# Altium PCB MOD-ADC-10.PCBDOC (part 2 of 4)
Units mm, origin at the board's own origin, x right, y up, seen from the top; angles counter-clockwise.
Board outline 80 x 100 mm, 4 copper layers (L1, P2, L3, L4), stack 1.512 mm thick; 199 components, 170 nets, 717 pads, 298 vias.
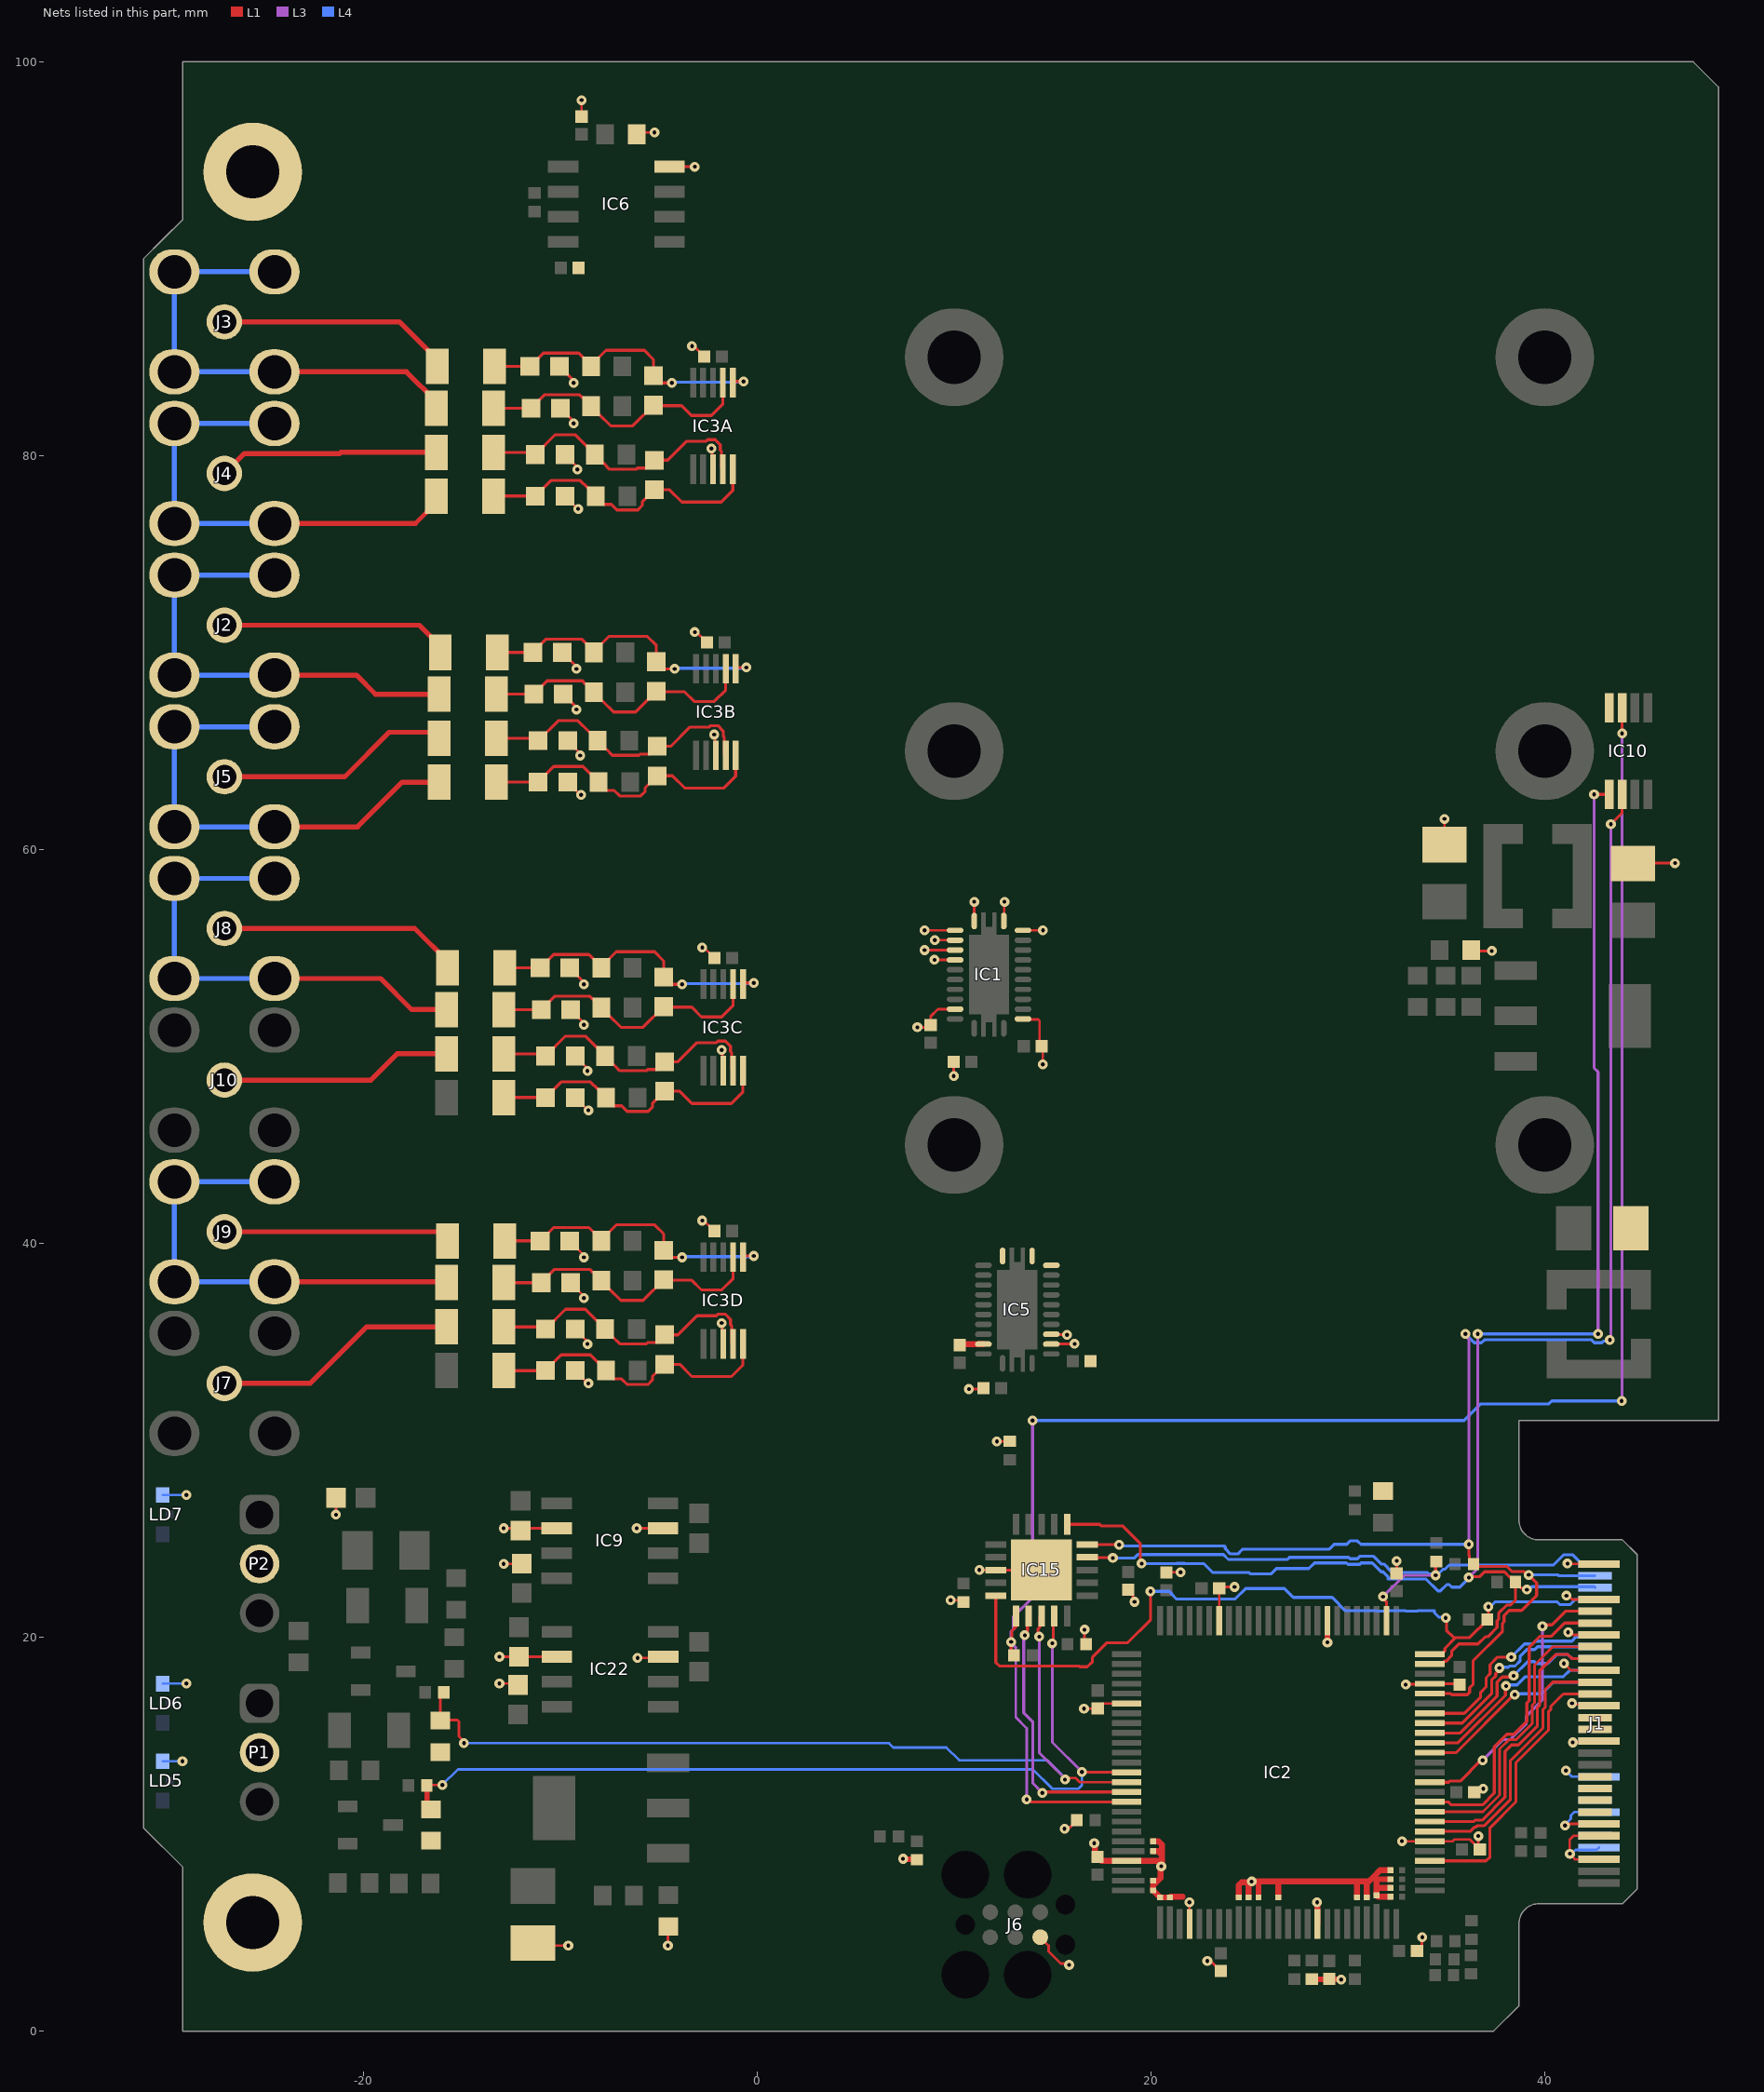
[diagram p4: the nets of this part, all layers, seen from the top]

## Part data
B1 B2 B3 B4 B5 B6 B7 B8: library part PLATED_HOLE2.7_PAD5.0, "Single Terminal Socket", Author="CERN DEM JMW", ComponentHeight=0mm, Component Type="Standard (No BOM)", CreateDate=27.09.2011, Family="Plated Hole", HelpURL=Undefined, LatestRevisionDate=27.09.2011, Mounted=No, PackageDescription="Plated Through Hole: Hole Dia.=2.7mm Pad Dia.=5.0mm", Part Description="Plated Through Hole: Hole Dia.=2.7mm Pad Dia.=5.0mm", Part Number=PLATED_HOLE2.7_PAD5.0, Pin Count=1, Sense=No, SMD=No, Socket=No, Status=None
C1A C1B C1C C1D C6A C6B C6C C6D C7A C7B C7C C7D C8A C8B C8C C8D C9A C9B C9C C9D C10A C10B C10C C10D: library part CC0603_1NF_50V_5%_NP0, "Non-polarised capacitor", Case=0603, Manufacturer=GENERIC, Manufacturer1 ComponentHeight=0.9mm, Manufacturer1 Example="YAGEO PHYCOMP", Manufacturer1 Part Number=CC0603JRNPO9BN102, Tolerance=±5%, Voltage=50V, Author="CERN DEM JLC", Component Type=Standard, CreateDate=22.10.2012, HelpURL=\\cern.ch\dfs\Applications\Altium\Datasheets\CC0805_NP0_PHYCOMP_16VTO50V.pdf, LatestRevisionDate=22.10.2012, Manufacturer Part Number=CC0603_1NF_50V_5%_NP0, Mounted=Yes, Part Description="SMD Multilayer Chip Ceramic Capacitor", Part Number=CC0603_1NF_50V_5%_NP0, Pin Count=2, Sense=No, SMD=Yes, Socket=No, Status=Preferred, TC=C0G/NP0
C2 C3 C4 C5 C11 C18 C20 C23 C24 C25 C29 C30: library part CC0402_1UF_16V_10%_X5R, "Non-polarised capacitor", Case=0402, Manufacturer=GENERIC, Manufacturer1 ComponentHeight=0.55mm, Manufacturer1 Example=TDK, Manufacturer1 Part Number=C1005X5R1C105KT, Tolerance=±10%, Voltage=16V, Author="CERN DEM JLC", Component Type=Standard, CreateDate=25.10.2012, HelpURL=\\cern.ch\dfs\Applications\Altium\Datasheets\CC0402_X5R_TDK_C.pdf, LatestRevisionDate=25.10.2012, Manufacturer Part Number=CC0402_1UF_16V_10%_X5R, Mounted=Yes, Part Description="SMD Multilayer Chip Ceramic Capacitor", Part Number=CC0402_1UF_16V_10%_X5R, Pin Count=2, Sense=No, SMD=Yes, Socket=No, Status=Preferred, TC=X5R
C12 C13 C14 C15: library part CTE3528-21_22UF_20V_10%, "Polarised capacitor", Case=B, Manufacturer=GENERIC, Manufacturer1 ComponentHeight=2.1mm, Manufacturer1 Example=AVX, Manufacturer1 Part Number=TAJB226K020R, Tolerance=±10%, Voltage=20V, Author="CERN DEM JLC", Component Type=Standard, CreateDate=03.12.2007, HelpURL=\\cern.ch\dfs\Applications\Altium\Datasheets\CTE_AVX_TAJ.pdf, LatestRevisionDate=03.12.2007, Manufacturer Part Number=CTE3528-21_22UF_20V_10%, Mounted=Yes, Part Description="Solid Tantalum Chip Capacitor", Part Number=CTE3528-21_22UF_20V_10%, Pin Count=2, Sense=No, SMD=Yes, Socket=No, Status=Preferred
C16 C17 C19 C22 C26 C27 C28 C31 C35A C35B C35C C35D: library part CC0402_100NF_16V_10%_X7R, "Non-polarised capacitor", Case=0402, Manufacturer=GENERIC, Manufacturer1 ComponentHeight=0.55mm, Manufacturer1 Example=MURATA, Manufacturer1 Part Number=GRM155R71C104KA88D, Tolerance=±10%, Voltage=16V, Author="CERN DEM JLC", Component Type=Standard, CreateDate=12/5/2013, HelpURL=\\cern.ch\dfs\Applications\Altium\Datasheets\CC0402_X7R_MURATA_GRM.pdf, LatestRevisionDate=12/3/2007, Manufacturer Part Number=CC0402_100NF_16V_10%_X7R, Mounted=Yes, Part Description="SMD Multilayer Chip Ceramic Capacitor", Part Number=CC0402_100NF_16V_10%_X7R, Pin Count=2, Sense=No, SMD=Yes, Socket=No, Status="Not Recommended", TC=X7R
C32 C33 C34 C47 C48 C49 C50: library part CC0603_10UF_10V_10%_X5R, "Non-polarised capacitor", Case=0603, Manufacturer=GENERIC, Manufacturer1 ComponentHeight=0.8mm, Manufacturer1 Example=MURATA, Manufacturer1 Part Number=GRM188R61A106KE69D, Tolerance=±10%, Voltage=10V, Author="CERN DEM JLC", Component Type=Standard, CreateDate=31.01.2017, HelpURL=\\cern.ch\dfs\Applications\Altium\Datasheets\CC0603_MURATA_GRM188R61A106KE69D.pdf, LatestRevisionDate=31.01.2017, Manufacturer Part Number=CC0603_10UF_10V_10%_X5R, Mounted=Yes, Part Description="SMD Multilayer Chip Ceramic Capacitor", Part Number=CC0603_10UF_10V_10%_X5R, Pin Count=2, Sense=No, SMD=Yes, Socket=No, Status=None, TC=X5R
F1 F2: library part FUSR1206_TYCO_NANOSMD016F, "Fuse", Manufacturer="TYCO ELECTRONICS", Manufacturer Part Number=nanoSMDC016F, Author="CERN DEM JLC", Component Type=Standard, ComponentHeight=1mm, CreateDate=03.07.2008, Family="Fuses Resettable", HelpURL=\\cern.ch\dfs\Applications\Altium\Datasheets\FUSR_TYCO_NanoSMD016F.pdf, LatestRevisionDate=04.08.2008, Mounted=Yes, PackageDescription="Chip Resettable Fuse, 2-Leads, Body 3.2mmx1.6mm, IPC Medium Density", Part Description="PolySwitch® PTC Overcurrent Protection Device", Part Number=FUSR1206_TYCO_NANOSMD016F, Pin Count=2, PressFit=No, Sense=No, SMD=Yes, Socket=No, Status=Obsolete, Status Comment="Replaced by LITTELFUSE nanoSMDC016F"
IC1 IC5: "8-Bit Dual-Supply Bus Transceiver With Configurable Voltage Translation and 3-State Outputs", Case=QFN24, Manufacturer="TEXAS INSTRUMENTS", Author="CERN DEM BC", Bonding=No, Component Type=Standard, ComponentHeight=1mm, CreateDate=05.05.2020, Device=SN74LXC8T245RHL, HelpURL=\\cern.ch\dfs\Applications\Altium\Datasheets\SN74LXC8T245.pdf, LatestRevisionDate=05.05.2020, Manufacturer Part Number=SN74LXC8T245RHL, Mounted=Yes, PackageDescription="TEXAS Case Style RHL (S-PVQFN-N24), QFN, 0.50mm Pitch, Rect.; 24 Pin, 5.50mm L X 3.50mm W X 1mm H body (w/Thermal Tab 4.05 X 2.05mm)", Part Description="SN74LXC8T245 8-bit Dual-Supply Bus Transceiver with Configurable Level Shifting and 3-State Outputs", Part Number=SN74LXC8T245RHL, Pin Count=25, PressFit=No, Sense=No, SMD=Yes, Socket=No
IC2: "MachXO2, 2.5V/3.3V High-Performance 2000 Macrocell CPLD, 80 I/Os, 100-Pin TQFP, Speed Grade 4, Industrial Grade", Case=QFP100, Manufacturer="LATTICE SEMICONDUCTOR", Author="CERN DEM MR", Bonding=No, Component Type=Standard, ComponentHeight=1.6mm, ComponentLink1Description="Package Drawing", ComponentLink1URL=\\cern.ch\dfs\Applications\Altium\Datasheets\LATTICE_Package.pdf, ComponentLink2Description=Pinout, ComponentLink2URL=\\cern.ch\dfs\Applications\Altium\Datasheets\LCMXO3LF-1300C-5TG100_Pinout.pdf, CreateDate=18.06.2019, Device=LCMXO3LF-1300C-5TG100C, HelpURL=\\cern.ch\dfs\Applications\Altium\Datasheets\LCMXO3LF_Serie.pdf, LatestRevisionDate=18.06.2019, Manufacturer Part Number=LCMXO3LF-1300C-5TG100C, Mounted=Yes, PackageDescription="QFP, 0.50mm Pitch, Square; 100 Pin, 14.0mm L X 14.0mm W X 1.60mm H body, IPC Medium Density", Part Description="MachXO3LF, 2.5V/3.3V Low-Density Ultra-Low Power FPGA, 1300 LUTs, 80 I/Os, 100-Pin TQFP, Speed Grade 5, Commercial Grade", Part Number=LCMXO3LF-1300C-5TG100C, Pin Count=100, PressFit=No, Sense=No, SMD=Yes, Socket=No
IC3A IC3B IC3C IC3D: "Quad Channel Single ADC Delta-Sigma 860sps 16-bit Serial 10-Pin VSSOP T/R", Case/Package=VSSOP, Manufacturer="Texas Instruments", Max Operating Temperature=125°C, Max Power Dissipation=900uW, Max Supply Voltage=5.5V, Min Operating Temperature=-40°C, Min Supply Voltage=2V, Operating Supply Voltage=3.3V, Package Quantity=250, Supplier Part Number=595-ADS1118IDGST, Supply Current=150uA, Category="Analog to Digital Converters (ADCs)", ComponentLink1Description=https://datasheet.ciiva.com/7989/1634024-7989312.pdf?src-supplier=Element14, ComponentLink1URL=https://datasheet.ciiva.com/7989/1634024-7989312.pdf?src-supplier=Element14, ComponentLink2Description=https://datasheet.ciiva.com/41461/001186694-da-01-en-ic-adc-16bit-sp-ads1118idgst-msop-10-tid-41461012.pdf?src-supplier=Conrad, ComponentLink2URL=https://datasheet.ciiva.com/41461/001186694-da-01-en-ic-adc-16bit-sp-ads1118idgst-msop-10-tid-41461012.pdf?src-supplier=Conrad, ComponentLink3Description=https://datasheet.ciiva.com/1261/ads1118-1261457.pdf?src-supplier=Digikey, ComponentLink3URL=https://datasheet.ciiva.com/1261/ads1118-1261457.pdf?src-supplier=Digikey, ComponentLink4Description=https://datasheet.ciiva.com/1261/ads1118-1261458.pdf?src-supplier=Digikey, ComponentLink4URL=https://datasheet.ciiva.com/1261/ads1118-1261458.pdf?src-supplier=Digikey, ComponentLink5Description=https://datasheet.ciiva.com/1261/ads1118-1261459.pdf?src-supplier=Digikey, ComponentLink5URL=https://datasheet.ciiva.com/1261/ads1118-1261459.pdf?src-supplier=Digikey, ComponentLink6Description=https://datasheet.ciiva.com/14259/ads1118-14259989.pdf?src-supplier=Avnet, ComponentLink6URL=https://datasheet.ciiva.com/14259/ads1118-14259989.pdf?src-supplier=Avnet, ComponentLink7Description=https://datasheet.ciiva.com/46394/1793017-46394506.pdf?src-supplier=Element14, ComponentLink7URL=https://datasheet.ciiva.com/46394/1793017-46394506.pdf?src-supplier=Element14, ComponentLink8Description=https://datasheet.ciiva.com/46394/1793017-46394507.pdf?src-supplier=Element14, ComponentLink8URL=https://datasheet.ciiva.com/46394/1793017-46394507.pdf?src-supplier=Element14, Contact Plating=Gold, Conversion Rate=860S/s, Height=1.1mm, Integral Nonlinearity (INL)=1LSB, Interface=SPI, Lead Free="Lead Free", Length=3.1mm, Manufacturer Part Number=ADS1118IDGST, Max Supply Voltage (DC)=5.5V, Min Supply Voltage (DC)=2V, Number of A/D Converters=1, Number of Bits=16, Number of Channels=2, Number of Converters=1, Number of Elements=1, Number of Inputs=4, Packaging="Tape and Reel", Pins=10, Polarity=Bipolar, Power Dissipation=900uW, Pricing="1=6.29, 10=4.83, 25=4.47, 50=4.47, 100=4.07, 250=3.87, 500=3.69, 1000=3.59, 2500=3.5, 10000=3.59 (USD)", Reach SVHC Compliant=No, Resolution=16b, RoHS=Yes, RoHS Compliant=Yes, Sampling Rate=860S/s, Series=-, Stock=2422, Supplier=Mouser, Supply Type=Single, Thickness=1.02mm, Width=3.1mm
IC6: "Dual Operational Amplifier", Case=SOIC8, Manufacturer="ST MICROELECTRONICS", Author="CERN DEM HF", Bonding=No, Component Type=Standard, ComponentHeight=1.75mm, CreateDate=21.12.2023, Device=LMV358IDT, HelpURL=\\cern.ch\dfs\Applications\Altium\Datasheets\LMV358.pdf, LatestRevisionDate=21.12.2023, Manufacturer Part Number=LMV358IDT, Mounted=Yes, PackageDescription="SOIC 8, Pitch 1.27mm - Body 4x5mm, IPC Medium Density", Part Description="Dual General Purpose, Low Voltage, Tiny Pack Comparator", Part Number=LMV358IDT, Pin Count=8, PressFit=No, Sense=No, SMD=Yes, Socket=No
IC7 IC8: "3-Terminal Regulator 1=Adj 2=OUT 3=IN 4=OUT", Case=SOT223, Manufacturer="TEXAS INSTRUMENTS", Manufacturer Part Number=LM1117IMPX-ADJ, Author="CERN DEM JLC", Bonding=No, Component Type=Standard, ComponentHeight=1.8mm, CreateDate=05.10.2011, Device=LM1117IMPX-ADJ/NOPB, HelpURL=\\cern.ch\dfs\Applications\Altium\Datasheets\LM1117IMPX-ADJ-NOPB.pdf, LatestRevisionDate=01.06.2022, Mounted=Yes, PackageDescription="SOT223, 2.30mm Pitch; 4 Pin, 3.70mm W X 6.70mm L X 1.80mm H body, IPC Medium Density", Part Description="1.25V to 13.8V, 800mA, Adjustable Low-Dropout Linear Regulator", Part Number=LM1117IMPX-ADJ/NOPB, Pin Count=4, PressFit=No, Sense=No, SMD=Yes, Socket=No
IC9 IC22: "Super Charge Pump DC-to-DC Voltage Converter", Case=SOIC8, Manufacturer="MICROCHIP TECHNOLOGY", Author="CERN DEM HF", Bonding=No, Component Type=Standard, ComponentHeight=1.75mm, CreateDate=28.02.2024, Device=TC7660SEOA, HelpURL=\\cern.ch\dfs\Applications\Altium\Datasheets\TC7660S.pdf, LatestRevisionDate=28.02.2024, Manufacturer Part Number=TC7660SEOA, Mounted=Yes, PackageDescription="SOIC 8, Pitch 1.27mm, Body 4x5mm, IPC Medium Density", Part Description="Super Charge Pump DC-to-DC Voltage Converter", Part Number=TC7660SEOA, Pin Count=8, PressFit=No, Sense=No, SMD=Yes, Socket=No
IC10: "High Accuracy Temperature Sensor With I2C and SMBus Interface in Industry Standard LM75", Case=uSOP8, Manufacturer="TEXAS INSTRUMENTS", Author="CERN DEM MR", Bonding=No, Component Type=Standard, ComponentHeight=1.1mm, CreateDate=04.10.2019, Device=TMP1075DGK, HelpURL=\\cern.ch\dfs\Applications\Altium\Datasheets\TMP1075DGK.pdf, LatestRevisionDate=04.10.2019, Manufacturer Part Number=TMP1075DGK, Mounted=Yes, PackageDescription="SOP, 0.65mm Pitch; 8 Pin, 3.00mm W X 3.00mm L X 1.10mm H body, IPC Medium Density", Part Description="High Accuracy Temperature Sensor with I2C and SMBus Interface in Industry Standard LM75", Part Number=TMP1075DGK, Pin Count=8, PressFit=No, Sense=No, SMD=Yes, Socket=No
IC15: library part IFC_PCA9501BS, "8-bit I2C-bus and SMBus I/O port with interrupt, 2-kbit / EEPROM and 6 address pins", Manufacturer=NXP, Manufacturer Part Number=PCA9501BS,118, Part Number=PCA9501BS
J1: library part AMPHENOL_MINI-Cool-56P, "64 contacts Board Eddge PCI Express x4 Socket", Manufacturer=AMPHENOL, Author="CERN DEM HF", Component Type="Standard (No BOM)", ComponentHeight=0mm, CreateDate=05.01.2026, HelpURL=\\cern.ch\dfs\Applications\Altium\Datasheets\AMPHENOL_ME1005610101011.pdf, LatestRevisionDate=05.01.2026, Manufacturer Part Number=AMPHENOL_MINI-Cool-56P, Mounted=Yes, Part Description="PCB Mini Cool Edge 0.60mm,Storage and Server connector ,Gen Z, 56 signal pins, SMT", Part Number=AMPHENOL_MINI-Cool-56P, Pin Count=56, PressFit=No, Sense=No, SMD=Yes, Socket=No, Status=None
J2 J3 J4 J5 J7 J8 J9 J10: "WR-MCX PCB Jack, THT, Right Angle, Solder Leg 1.73mm", Frequency Range=DC~6GHz, Manufacturer="Wurth Elektronik", Operating Temperature Max=155°C, Operating Temperature Min=-55°C, Category="Coaxial Connectors", Center Contact Diameter=0.96mm, ComponentLink1Description="Website Link", ComponentLink1URL=https://www.we-online.com/redexpert/article/60611002111502?ad, ComponentLink2Description="Datasheet Link", ComponentLink2URL=https://www.we-online.com/redexpert/spec/60611002111502?ad, Connector Type=MCX, Gender=Jack, Impedance=50Ω, Interface Type="IEC 61169-36", Manufacturer Part Number=60611002111502, Match Code=WR-MCX, Mount="Through Hole", Orientation="Right Angle", Packaging=Tray, PANEL_FEATURE=Yes
  J2: PANEL_LABEL=CH2
  J3: PANEL_LABEL=CH0
  J4: PANEL_LABEL=CH1
  J5: PANEL_LABEL=CH3
  J7: PANEL_LABEL=CH7
  J8: PANEL_LABEL=CH4
  J9: PANEL_LABEL=CH6
  J10: PANEL_LABEL=CH5
J6: "TC2030-MCP and TC2030-MCP-NL Pad Contact", Author="CERN DEM HF", Component Type="Standard (No BOM)", ComponentHeight=0mm, CreateDate=27.03.2023, Family=TC2030-MCP, HelpURL=\\cern.ch\dfs\Applications\Altium\Datasheets\TC2030-MCP.pdf, LatestRevisionDate=27.03.2023, Mounted=No, PackageDescription="6 X 31mil Diameter SMD Pad For TC2030-MCP Legged Connector", Part Description="6 X 31mil Diameter SMD Pad For TC2030-MCP Legged Connector", Part Number=TC2030-MCP, Pin Count=6, Sense=No, SMD=Yes, Socket=No, Status=None
L1 L2: library part IND_33UH_30%_WURTH_WE-TPC_744043330, "Inductor With Core", Manufacturer="WURTH ELEKTRONIK", Manufacturer Part Number=744043330, Power=820mA, Resistance=0.23R, Tolerance=±30%, Author="CERN DEM JLC", Component Type=Standard, ComponentHeight=3mm, CreateDate=24.11.2014, HelpURL=\\cern.ch\dfs\Applications\Altium\Datasheets\IND_WURTH_WE-TPC_744043330.pdf, LatestRevisionDate=24.11.2014, Mounted=Yes, Part Description="Shielded Tiny Power Inductor (WE-TPC Series)", Part Number=IND_33UH_30%_WURTH_WE-TPC_744043330, Pin Count=2, Sense=No, SMD=Yes, Socket=No
L4: library part IND1210_100UH_10%_EPCOS_B82422H, "Inductor With Core", Case=1210, Manufacturer=EPCOS, Manufacturer Part Number=B82422H1104K000, Power=150mA, Resistance=4.8R, Tolerance=±10%, Author="CERN DEM JLC", Component Type=Standard, ComponentHeight=2.4mm, CreateDate=04.06.2012, HelpURL=\\cern.ch\dfs\Applications\Altium\Datasheets\IND1210_EPCOS_B82422H.pdf, LatestRevisionDate=04.06.2012, Mounted=Yes, Part Description="SMT Inductor SIMID Series", Part Number=IND1210_100UH_10%_EPCOS_B82422H, Pin Count=2, Sense=No, SMD=Yes, Socket=No
LD5: library part LED_AVAGO_HSME-C120, "LED Green 1C 2A", Manufacturer="AVAGO TECHNOLOGIES", Manufacturer Part Number=HSME-C120, Author="CERN DEM JMW", Bonding=No, Color=Green, Component Type=Standard, ComponentHeight=0.7mm, ComponentLink1Description="Design Guide", ComponentLink1URL=\\cern.ch\dfs\Applications\Altium\Datasheets\LED_AVAGO_HSME-C110_DESIGN-GUIDE.pdf, CreateDate=22.07.2009, HelpURL=\\cern.ch\dfs\Applications\Altium\Datasheets\LED_AVAGO_HSME-C120.pdf, LatestRevisionDate=20.06.2012, Mounted=Yes, PackageDescription="Green Chip LED, 2-Leads, Body 1.7x1.1mm, Side Emitting Package", PANEL_FEATURE=Yes, PANEL_LABEL=STAT, Part Description="High Performance Right Angle Chip Green LED", Part Number=LED_AVAGO_HSME-C120, Pin Count=2, PressFit=No, Sense=No, SMD=Yes, Socket=No, Status="Not Recommended"
LD6 LD7: library part LED_AVAGO_HSMC-C120, "LED Red 1C 2A", Manufacturer="AVAGO TECHNOLOGIES", Manufacturer Part Number=HSMC-C120, Author="CERN DEM JMW", Bonding=No, Color=Red, Component Type=Standard, ComponentHeight=0.7mm, ComponentLink1Description="Design Guide", ComponentLink1URL=\\cern.ch\dfs\Applications\Altium\Datasheets\LED_AVAGO_HSMC-C120_DESIGN-GUIDE.pdf, CreateDate=22.07.2009, HelpURL=\\cern.ch\dfs\Applications\Altium\Datasheets\LED_AVAGO_HSMC-C120.pdf, LatestRevisionDate=20.06.2012, Mounted=Yes, PackageDescription="Red Chip LED, 2-Leads, Body 1.7x1.1mm, Side Emitting Package", PANEL_FEATURE=Yes, Part Description="High Performance Right Angle Chip Red LED", Part Number=LED_AVAGO_HSMC-C120, Pin Count=2, PressFit=No, Sense=No, SMD=Yes, Socket=No, Status="Not Recommended"
  LD6: PANEL_LABEL=OVL0
  LD7: PANEL_LABEL=OVL1
NT1 NT2 NT3 NT4 NT5 NT6 NT7 NT9 NT10 NT11 NT12 NT13 NT14 NT15 NT16 NT19 NT20: library part "Net Tie 3", Author="CERN DEM HF", Component Type="Net Tie", ComponentHeight=0mm, CreateDate=23.09.2024, Family="Net Tie", HelpURL=Undefined, LatestRevisionDate=23.09.2024, Mounted=No, PackageDescription="SMD Net Tie", Part Description="Net Tie (2 Nets)", Part Number="Net Tie 3", Pin Count=2, Sense=No, SMD=No, Socket=No, Status=None
P1 P2: "WR-TBL Series 382 Horizontal PCB Header, THT, pitch 2.5mm, 3p", Manufacturer="Wurth Elektronik", Operating Temperature Max=105°C, Operating Temperature Min=-40°C, Rated Current=4A, Working Voltage=160V, Application=Pluggable, Category="Terminal Blocks", ComponentLink1Description="Website Link", ComponentLink1URL=https://www.we-online.com/redexpert/article/691382010003?ad, ComponentLink2Description="Datasheet Link", ComponentLink2URL=https://www.we-online.com/redexpert/spec/691382010003?ad, Manufacturer Part Number=691382010003, Match Code=WR-TBL, Modularity=No, Mount="Through Hole", Number of Pins=3, Number of Rows=1, Orientation=Horizontal, Packaging=Box, PANEL_FEATURE=Yes, Pitch=2.5mm
  P1: PANEL_LABEL=PWR0-3
  P2: PANEL_LABEL=PWR4-7
R1 R2 R80: library part R0402_20K_1%_0.0625W_100PPM, "Resistor - 1%", Case=0402, Manufacturer=GENERIC, Manufacturer1 ComponentHeight=0.4mm, Manufacturer1 Example="YAGEO PHYCOMP", Manufacturer1 Part Number=232270672003L, Power=0.0625W, Tolerance=±1%, Author="CERN DEM JLC", Component Type=Standard, CreateDate=03.12.2007, HelpURL=\\cern.ch\dfs\Applications\Altium\Datasheets\R0402_Phycomp_RC0402.pdf, LatestRevisionDate=17.10.2012, Manufacturer Part Number=R0402_20K_1%_0.0625W_100PPM, Mounted=Yes, Part Description="General Purpose Thick Film Chip Resistor", Part Number=R0402_20K_1%_0.0625W_100PPM, Pin Count=2, PressFit=No, Sense=No, SMD=Yes, Socket=No, Status="Not Recommended", TC=±100ppm/°C
R3 R23 R24 R26 R27 R29 R30 R31 R32 R33 R35: library part R0603_4K7_1%_0.1W_100PPM, "Resistor - 1%", Case=0603, Manufacturer=GENERIC, Manufacturer1 ComponentHeight=0.55mm, Manufacturer1 Example="NIC COMPONENT", Manufacturer1 Part Number=NRC06F4701TRF, Power=0.1W, Tolerance=±1%, Author="CERN DEM JLC", Component Type=Standard, CreateDate=03.12.2007, HelpURL=\\cern.ch\dfs\Applications\Altium\Datasheets\R0603_NIC_NRC.pdf, LatestRevisionDate=13.03.2008, Manufacturer Part Number=R0603_4K7_1%_0.1W_100PPM, Mounted=Yes, Part Description="General Purpose Thick Film Chip Resistor", Part Number=R0603_4K7_1%_0.1W_100PPM, Pin Count=2, PressFit=No, Sense=No, SMD=Yes, Socket=No, Status=Preferred, TC=±100ppm/°C
R4A R4B R4C R4D R6A R6B R6C R6D R12A R12B R12C R12D R14A R14B R14C R14D: library part R1206_120K_0.1%_0.25W_25PPM, "Resistor - 0.1%", Case=1206, Manufacturer=GENERIC, Manufacturer1 ComponentHeight=0.70mm, Manufacturer1 Example=KOA, Manufacturer1 Part Number=RN73H2BTTD1203B25, Power=0.25W, Tolerance=±0.1%, Author="CERN DEM JLC", Component Type=Standard, CreateDate=03.12.2007, HelpURL=\\cern.ch\dfs\Applications\Altium\Datasheets\R1206_KOA_RN73H.pdf, LatestRevisionDate=13.03.2008, Manufacturer Part Number=R1206_120K_0.1%_0.25W_25PPM, Mounted=Yes, Part Description="Thin Film Chip Resistor", Part Number=R1206_120K_0.1%_0.25W_25PPM, Pin Count=2, PressFit=No, Sense=No, SMD=Yes, Socket=No, Status="Not Recommended", TC=±25ppm/°C
R5A R5B R5C R5D R7A R7B R7C R7D R13A R13B R13C R13D R15A R15B R15C R15D: library part R0603_30K_0.1%_0.063W_25PPM, "Resistor - 0.1%", Case=0603, Manufacturer=GENERIC, Manufacturer1 ComponentHeight=0.55mm, Manufacturer1 Example="TE CONNECTIVITY", Manufacturer1 Part Number=CPF0603B30KE, Power=0.063W, Tolerance=±0.1%, Author="CERN DEM JMW", Component Type=Standard, CreateDate=28.07.2021, HelpURL=\\cern.ch\dfs\Applications\Altium\Datasheets\R0603_TYCO_CPF.pdf, LatestRevisionDate=28.07.2021, Manufacturer Part Number=R0603_30K_0.1%_0.063W_25PPM, Mounted=Yes, Part Description="Thin Film Precision Resistor", Part Number=R0603_30K_0.1%_0.063W_25PPM, Pin Count=2, PressFit=No, Sense=No, SMD=Yes, Socket=No, Status="Not Recommended", TC=±25ppm/°C
R8 R9 R10 R11: library part R0402_22K_1%_0.0625W_100PPM, "Resistor - 1%", Case=0402, Manufacturer=GENERIC, Manufacturer1 ComponentHeight=0.4mm, Manufacturer1 Example="YAGEO PHYCOMP", Manufacturer1 Part Number=232270672203L, Power=0.0625W, Tolerance=±1%, Author="CERN DEM JLC", Component Type=Standard, CreateDate=03.12.2007, HelpURL=\\cern.ch\dfs\Applications\Altium\Datasheets\R0402_Phycomp_RC0402.pdf, LatestRevisionDate=17.10.2012, Manufacturer Part Number=R0402_22K_1%_0.0625W_100PPM, Mounted=Yes, Part Description="General Purpose Thick Film Chip Resistor", Part Number=R0402_22K_1%_0.0625W_100PPM, Pin Count=2, PressFit=No, Sense=No, SMD=Yes, Socket=No, Status="Not Recommended", TC=±100ppm/°C
R16 R17 R18 R19: library part "R0603_3K_1%_0.33W_100PPM_VISHAY_CRCW-HP e3", "Resistor - 1%", Case=0603, Manufacturer="VISHAY DRALORIC", Manufacturer Part Number=CRCW06033K00FKEAHP, Power=0.33W, Tolerance=±1%, Voltage=75V, Author="CERN DEM BC", Component Type=Standard, ComponentHeight=0.55mm, CreateDate=01.03.2021, HelpURL="\\cern.ch\dfs\Applications\Altium\Datasheets\R0603_VISHAY_CRCW-HP e3.pdf", LatestRevisionDate=01.03.2021, Mounted=Yes, Part Description="Pulse Proof, High Power Thick Film Chip Resistor", Part Number="R0603_3K_1%_0.33W_100PPM_VISHAY_CRCW-HP e3", Pin Count=2, PressFit=No, Sense=No, SMD=Yes, Socket=No, Status=None, TC=±100ppm/°C
R20: library part R0603_680R_1%_0.1W_100PPM, "Resistor - 1%", Case=0603, Manufacturer=GENERIC, Manufacturer1 ComponentHeight=0.55mm, Manufacturer1 Example="NIC COMPONENT", Manufacturer1 Part Number=NRC06F6800TRF, Power=0.1W, Tolerance=±1%, Author="CERN DEM JLC", Component Type=Standard, CreateDate=03.12.2007, HelpURL=\\cern.ch\dfs\Applications\Altium\Datasheets\R0603_NIC_NRC.pdf, LatestRevisionDate=13.03.2008, Manufacturer Part Number=R0603_680R_1%_0.1W_100PPM, Mounted=Yes, Part Description="General Purpose Thick Film Chip Resistor", Part Number=R0603_680R_1%_0.1W_100PPM, Pin Count=2, PressFit=No, Sense=No, SMD=Yes, Socket=No, Status=Preferred, TC=±100ppm/°C
R21 R25 R28 R62 R63 R64: library part R0402_13K_1%_0.0625W_100PPM, "Resistor - 1%", Case=0402, Manufacturer=GENERIC, Manufacturer1 ComponentHeight=0.4mm, Manufacturer1 Example="YAGEO PHYCOMP", Manufacturer1 Part Number=232270671303L, Power=0.0625W, Tolerance=±1%, Author="CERN DEM JLC", Component Type=Standard, CreateDate=03.12.2007, HelpURL=\\cern.ch\dfs\Applications\Altium\Datasheets\R0402_Phycomp_RC0402.pdf, LatestRevisionDate=17.10.2012, Manufacturer Part Number=R0402_13K_1%_0.0625W_100PPM, Mounted=Yes, Part Description="General Purpose Thick Film Chip Resistor", Part Number=R0402_13K_1%_0.0625W_100PPM, Pin Count=2, PressFit=No, Sense=No, SMD=Yes, Socket=No, Status="Not Recommended", TC=±100ppm/°C
R22 R34 R47 R48: library part R0402_3K3_1%_0.0625W_100PPM, "Resistor - 1%", Case=0402, Manufacturer=GENERIC, Manufacturer1 ComponentHeight=0.4mm, Manufacturer1 Example="YAGEO PHYCOMP", Manufacturer1 Part Number=232270673302L, Power=0.0625W, Tolerance=±1%, Author="CERN DEM JLC", Component Type=Standard, CreateDate=03.12.2007, HelpURL=\\cern.ch\dfs\Applications\Altium\Datasheets\R0402_Phycomp_RC0402.pdf, LatestRevisionDate=17.10.2012, Manufacturer Part Number=R0402_3K3_1%_0.0625W_100PPM, Mounted=Yes, Part Description="General Purpose Thick Film Chip Resistor", Part Number=R0402_3K3_1%_0.0625W_100PPM, Pin Count=2, PressFit=No, Sense=No, SMD=Yes, Socket=No, Status="Not Recommended", TC=±100ppm/°C
R58 R76: library part R0402_47K_1%_0.0625W_100PPM, "Resistor - 1%", Case=0402, Manufacturer=GENERIC, Manufacturer1 ComponentHeight=0.4mm, Manufacturer1 Example="YAGEO PHYCOMP", Manufacturer1 Part Number=232270674703L, Power=0.0625W, Tolerance=±1%, Author="CERN DEM JLC", Component Type=Standard, CreateDate=03.12.2007, HelpURL=\\cern.ch\dfs\Applications\Altium\Datasheets\R0402_Phycomp_RC0402.pdf, LatestRevisionDate=17.10.2012, Manufacturer Part Number=R0402_47K_1%_0.0625W_100PPM, Mounted=Yes, Part Description="General Purpose Thick Film Chip Resistor", Part Number=R0402_47K_1%_0.0625W_100PPM, Pin Count=2, PressFit=No, Sense=No, SMD=Yes, Socket=No, Status="Not Recommended", TC=±100ppm/°C
R59 R61: library part R0402_2K4_1%_0.0625W_100PPM, "Resistor - 1%", Case=0402, Manufacturer=GENERIC, Manufacturer1 ComponentHeight=0.4mm, Manufacturer1 Example="YAGEO PHYCOMP", Manufacturer1 Part Number=232270672402L, Power=0.0625W, Tolerance=±1%, Author="CERN DEM JLC", Component Type=Standard, CreateDate=03.12.2007, HelpURL=\\cern.ch\dfs\Applications\Altium\Datasheets\R0402_Phycomp_RC0402.pdf, LatestRevisionDate=17.10.2012, Manufacturer Part Number=R0402_2K4_1%_0.0625W_100PPM, Mounted=Yes, Part Description="General Purpose Thick Film Chip Resistor", Part Number=R0402_2K4_1%_0.0625W_100PPM, Pin Count=2, PressFit=No, Sense=No, SMD=Yes, Socket=No, Status="Not Recommended", TC=±100ppm/°C
R60: library part R0402_24K_1%_0.0625W_100PPM, "Resistor - 1%", Case=0402, Manufacturer=GENERIC, Manufacturer1 ComponentHeight=0.4mm, Manufacturer1 Example="YAGEO PHYCOMP", Manufacturer1 Part Number=232270672403L, Power=0.0625W, Tolerance=±1%, Author="CERN DEM JLC", Component Type=Standard, CreateDate=03.12.2007, HelpURL=\\cern.ch\dfs\Applications\Altium\Datasheets\R0402_Phycomp_RC0402.pdf, LatestRevisionDate=17.10.2012, Manufacturer Part Number=R0402_24K_1%_0.0625W_100PPM, Mounted=Yes, Part Description="General Purpose Thick Film Chip Resistor", Part Number=R0402_24K_1%_0.0625W_100PPM, Pin Count=2, PressFit=No, Sense=No, SMD=Yes, Socket=No, Status="Not Recommended", TC=±100ppm/°C
R77 R78 R79: library part R0402_NO-VALUE, "Resistor", Case=0402, Author="CERN DEM JLC", Component Type=Standard, CreateDate=03.12.2007, HelpURL=Undefined, LatestRevisionDate=13.03.2008, Manufacturer=Undefined, Manufacturer1 ComponentHeight=Undefined, Manufacturer1 Example=Undefined, Manufacturer1 Part Number=Undefined, Manufacturer Part Number=R0402_NO-VALUE, Mounted=No, Part Description="Reserved Footprint For a 0402 (1005) Chip Resistor", Part Number=R0402_NO-VALUE, Pin Count=2, PressFit=No, Sense=No, SMD=Yes, Socket=No, Status=None
SCREW1 SCREW2 SCREW3 SCREW4 SCREW5 SCREW6: library part BOSSARD_BN5687-3061587_v, "Screw", Manufacturer=BOSSARD, Manufacturer Part Number="BN5687 Art.3061587", Author="CERN DEM JLC", ClassName=Overlapping, Component Type=Mechanical, ComponentHeight=2.1mm, CreateDate=22.08.2013, HelpURL=\\cern.ch\dfs\Applications\Altium\Datasheets\BOSSARD_BN5687-3061587.pdf, LatestRevisionDate=22.08.2013, Mounted=Yes, PackageDescription="M2.5 L=4mm Hexalobular Socket Pan Head Screw, Fully Threaded - Stainless Steel A2", Part Description="M2.5 L=4mm Hexalobular Socket Pan Head Screw, Fully Threaded, Stainless Steel A2", Part Number=BOSSARD_BN5687-3061587_v, Pin Count=0, PressFit=No, Sense=No, SMD=No, Socket=No, Status=None
T1 T5: "PNP Transistor", Case=SOT23-3, Manufacturer="NXP SEMICONDUCTORS", Author="CERN DEM JLC", Bonding=No, Component Type=Standard, ComponentHeight=1.1mm, CreateDate=14.06.2011, Device=BC857B, HelpURL=\\cern.ch\dfs\Applications\Altium\Datasheets\BC857B.pdf, LatestRevisionDate=14.06.2011, Manufacturer Part Number=BC857B, Mounted=Yes, PackageDescription="SOT23, 3 pin, Pitch 0.95mm - 1.3mm W X 2.9mm L X 1.1mm H, IPC Medium Density", Part Description="45V 100mA PNP general-purpose transistors", Part Number=BC857B, Pin Count=3, PressFit=No, Sense=No, SMD=Yes, Socket=No

## Via types
v1: diameter 0.5, hole 0.2, L1 to L4, tented both sides, 290 vias
v2: diameter 0.5, hole 0.2, L1 to L4, 8 vias

## Nets (pads, with @x,y where several pads share a name; then routed paths per layer and width w, separated by ;. In a path a pad name is that pad's centre, name@x,y a point inside that pad or via, vN(x,y) a via of type N, cw(c..) or ccw(c..) an arc to the next point about the centre after c; other vN are vias at no path point)
AIN0A: C1A.1 C6A.2 IC3A.4 R4A.2 R5A.1 | length 14.8
  L1 w0.152: R4A.2@-13.4,80.169 -11.387,80.169 C1A.1@-11.275,80.057 -10.263,81.069 -9.262,81.069 -8.674,80.481 -8.624,80.481 -8.25,80.107 R5A.1@-8.25,80.057 -8.25,80.007 -7.876,79.633 -7.826,79.633 -7.502,79.309 -6.161,79.309 -6.1,79.37 -5.624,79.37 C6A.2@-5.225,79.769 -4.545,79.769 -3.578,80.737 -2.6,80.737 -2.52,80.816 -2.144,80.816 -1.879,80.551 -1.879,80.283 -1.824,80.228 -1.824,79.383 IC3A.4@-1.75,79.309
AIN0B: C1B.1 C6B.2 IC3B.4 R4B.2 R5B.1 | length 14.8
  L1 w0.152: R4B.2@-13.256,65.643 -11.243,65.643 C1B.1@-11.131,65.531 -10.12,66.543 -9.118,66.543 -8.53,65.955 -8.48,65.955 -8.106,65.581 R5B.1@-8.106,65.531 -8.106,65.481 -7.733,65.107 -7.683,65.107 -7.358,64.783 -6.017,64.783 -5.956,64.844 -5.48,64.844 C6B.2@-5.081,65.243 -4.402,65.243 -3.434,66.211 -2.456,66.211 -2.376,66.29 -2.001,66.29 -1.735,66.025 -1.735,65.757 -1.68,65.702 -1.68,64.857 IC3B.4@-1.606,64.783
AIN0C: C1C.1 C6C.2 IC3C.4 R4C.2 R5C.1 | length 14.8
  L1 w0.152: R4C.2@-12.881,49.626 -10.868,49.626 C1C.1@-10.756,49.514 -9.744,50.526 -8.743,50.526 -8.155,49.938 -8.105,49.938 -7.731,49.564 R5C.1@-7.731,49.514 -7.731,49.464 -7.357,49.09 -7.307,49.09 -6.983,48.766 -5.642,48.766 -5.581,48.827 -5.105,48.827 C6C.2@-4.706,49.226 -4.027,49.226 -3.059,50.193 -2.081,50.193 -2.001,50.273 -1.626,50.273 -1.36,50.007 -1.36,49.74 -1.305,49.685 -1.305,48.839 IC3C.4@-1.231,48.766
AIN0D: C1D.1 C6D.2 IC3D.4 R4D.2 R5D.1 | length 14.8
  L1 w0.152: R4D.2@-12.881,35.758 -10.868,35.758 C1D.1@-10.756,35.647 -9.744,36.658 -8.743,36.658 -8.155,36.07 -8.105,36.07 -7.731,35.697 R5D.1@-7.731,35.647 -7.731,35.597 -7.357,35.223 -7.307,35.223 -6.983,34.898 -5.642,34.898 -5.581,34.96 -5.105,34.96 C6D.2@-4.706,35.358 -4.027,35.358 -3.059,36.326 -2.081,36.326 -2.001,36.406 -1.626,36.406 -1.36,36.14 -1.36,35.873 -1.305,35.818 -1.305,34.972 IC3D.4@-1.231,34.898
AIN1A: C6A.1 C7A.2 IC3A.5 R6A.2 R7A.1 | length 15.3
  L1 w0.152: R6A.2@-13.4,77.95 C7A.2@-11.275,77.95 -10.481,78.744 -8.994,78.744 -8.624,78.374 -8.574,78.374 -8.2,78 R7A.1@-8.2,77.95 -8.2,77.9 -7.826,77.526 -7.414,77.526 -7.134,77.247 -6.066,77.247 -5.845,77.468 -5.845,77.649 C6A.1@-5.225,78.269 -4.455,78.269 -3.835,77.649 -1.84,77.649 -1.25,78.24 IC3A.5@-1.25,79.309
AIN1B: C6B.1 C7B.2 IC3B.5 R6B.2 R7B.1 | length 15.3
  L1 w0.152: R6B.2@-13.256,63.424 C7B.2@-11.131,63.424 -10.337,64.218 -8.85,64.218 -8.48,63.848 -8.43,63.848 -8.056,63.474 R7B.1@-8.056,63.424 -8.056,63.374 -7.683,63 -7.27,63 -6.991,62.721 -5.922,62.721 -5.701,62.942 -5.701,63.123 C6B.1@-5.081,63.743 -4.311,63.743 -3.691,63.123 -1.697,63.123 -1.106,63.714 IC3B.5@-1.106,64.783
AIN1C: C6C.1 C7C.2 IC3C.5 R6C.2 R7C.1 | length 15.3
  L1 w0.152: R6C.2@-12.881,47.407 C7C.2@-10.756,47.407 -9.962,48.201 -8.475,48.201 -8.105,47.83 -8.055,47.83 -7.681,47.457 R7C.1@-7.681,47.407 -7.681,47.357 -7.307,46.983 -6.895,46.983 -6.615,46.703 -5.547,46.703 -5.326,46.924 -5.326,47.106 C6C.1@-4.706,47.726 -3.936,47.726 -3.316,47.106 -1.322,47.106 -0.731,47.696 IC3C.5@-0.731,48.766
AIN1D: C6D.1 C7D.2 IC3D.5 R6D.2 R7D.1 | length 15.3
  L1 w0.152: R6D.2@-12.881,33.539 C7D.2@-10.756,33.539 -9.962,34.333 -8.475,34.333 -8.105,33.963 -8.055,33.963 -7.681,33.589 R7D.1@-7.681,33.539 -7.681,33.489 -7.307,33.116 -6.895,33.116 -6.615,32.836 -5.547,32.836 -5.326,33.057 -5.326,33.239 C6D.1@-4.706,33.858 -3.936,33.858 -3.316,33.239 -1.322,33.239 -0.731,33.829 IC3D.5@-0.731,34.898
AIN2A: C8A.1 C9A.2 IC3A.6 R12A.2 R13A.1 | length 15.3
  L1 w0.152: R12A.2@-13.35,84.538 -11.552,84.538 C8A.1@-11.55,84.536 -10.872,85.215 -9.076,85.215 R13A.1@-8.45,84.588 ; R13A.1@-8.45,84.538 R13A.1@-8.45,84.588 ; v1(-4.343,83.7) -4.91,83.7 C9A.2@-5.275,84.065 -5.275,84.888 -5.74,85.353 -7.686,85.353 R13A.1@-8.45,84.588 ; IC3A.6@-1.25,83.709 -1.188,83.771 v1(-0.7,83.771)
  L4 w0.152: v1(-4.343,83.7) -4.308,83.735 -0.735,83.735 v1(-0.7,83.771)
AIN2B: C8B.1 C9B.2 IC3B.6 R12B.2 R13B.1 | length 15.3
  L1 w0.152: R12B.2@-13.206,70.012 -11.408,70.012 C8B.1@-11.406,70.01 -10.728,70.689 -8.933,70.689 R13B.1@-8.306,70.062 ; R13B.1@-8.306,70.012 R13B.1@-8.306,70.062 ; v1(-4.2,69.174) -4.766,69.174 C9B.2@-5.131,69.539 -5.131,70.362 -5.596,70.827 -7.542,70.827 R13B.1@-8.306,70.062 ; IC3B.6@-1.106,69.183 -1.045,69.245 v1(-0.556,69.245)
  L4 w0.152: v1(-4.2,69.174) -4.164,69.209 -0.592,69.209 v1(-0.556,69.245)
AIN2C: C8C.1 C9C.2 IC3C.6 R12C.2 R13C.1 | length 15.3
  L1 w0.152: R12C.2@-12.831,53.995 C8C.1@-11.031,53.993 C8C.1@-11.031,53.993 -10.353,54.671 -8.557,54.671 R13C.1@-7.931,54.045 ; R13C.1@-7.931,53.995 R13C.1@-7.931,54.045 ; v1(-3.825,53.157) -4.391,53.157 C9C.2@-4.756,53.522 -4.756,54.344 -5.221,54.809 -7.167,54.809 R13C.1@-7.931,54.045 ; IC3C.6@-0.731,53.166 -0.67,53.227 v1(-0.181,53.227)
  L4 w0.152: v1(-3.825,53.157) -3.789,53.192 -0.217,53.192 v1(-0.181,53.227)
AIN2D: C8D.1 C9D.2 IC3D.6 R12D.2 R13D.1 | length 15.3
  L1 w0.152: R12D.2@-12.831,40.128 -11.033,40.128 C8D.1@-11.031,40.126 -10.353,40.804 -8.557,40.804 R13D.1@-7.931,40.178 ; R13D.1@-7.931,40.128 R13D.1@-7.931,40.178 ; v1(-3.825,39.289) -4.391,39.289 C9D.2@-4.756,39.654 -4.756,40.477 -5.221,40.942 -7.167,40.942 R13D.1@-7.931,40.178 ; IC3D.6@-0.731,39.298 -0.67,39.36 v1(-0.181,39.36)
  L4 w0.152: v1(-3.825,39.289) -3.789,39.325 -0.217,39.325 v1(-0.181,39.36)
AIN3A: C9A.1 C10A.2 IC3A.7 R14A.2 R15A.1 | length 14.4
  L1 w0.152: R14A.2@-13.4,82.415 C10A.2@-11.5,82.415 -10.822,83.093 -9.028,83.093 -8.874,82.939 -8.824,82.939 -8.618,82.733 R15A.1@-8.618,82.683 ; R15A.1@-8.45,82.515 -8.45,82.465 -8.076,82.091 -8.026,82.091 -7.45,81.515 -6.325,81.515 C9A.1@-5.275,82.565 -5.25,82.54 -3.851,82.54 -3.358,82.047 -2.332,82.047 -1.75,82.629 IC3A.7@-1.75,83.709
AIN3B: C9B.1 C10B.2 IC3B.7 R14B.2 R15B.1 | length 14.4
  L1 w0.152: R14B.2@-13.256,67.889 C10B.2@-11.356,67.889 -10.678,68.567 -8.885,68.567 -8.73,68.413 -8.68,68.413 -8.475,68.207 R15B.1@-8.475,68.157 ; R15B.1@-8.306,67.989 -8.306,67.939 -7.933,67.565 -7.883,67.565 -7.306,66.989 -6.181,66.989 C9B.1@-5.131,68.039 -5.106,68.014 -3.707,68.014 -3.214,67.521 -2.189,67.521 -1.606,68.103 IC3B.7@-1.606,69.183
AIN3C: C9C.1 C10C.2 IC3C.7 R14C.2 R15C.1 | length 14.4
  L1 w0.152: R14C.2@-12.881,51.872 C10C.2@-10.981,51.872 -10.303,52.55 -8.509,52.55 -8.355,52.395 -8.305,52.395 -8.1,52.19 R15C.1@-8.1,52.14 ; R15C.1@-7.931,51.972 -7.931,51.922 -7.557,51.548 -7.507,51.548 -6.931,50.972 -5.806,50.972 C9C.1@-4.756,52.022 -4.731,51.996 -3.332,51.996 -2.839,51.503 -1.814,51.503 -1.231,52.086 IC3C.7@-1.231,53.166
AIN3D: C9D.1 C10D.2 IC3D.7 R14D.2 R15D.1 | length 14.4
  L1 w0.152: R14D.2@-12.881,38.004 C10D.2@-10.981,38.004 -10.303,38.683 -8.509,38.683 -8.355,38.528 -8.305,38.528 -8.1,38.323 R15D.1@-8.1,38.273 ; R15D.1@-7.931,38.104 -7.931,38.054 -7.557,37.681 -7.507,37.681 -6.931,37.104 -5.806,37.104 C9D.1@-4.756,38.154 -4.731,38.129 -3.332,38.129 -2.839,37.636 -1.814,37.636 -1.231,38.218 IC3D.7@-1.231,39.298
CH0: J3.1 R12A.1 | length 11.9
  L1 w0.254: J3.1@-27.068,86.8 -18.187,86.8 -16.25,84.863 R12A.1@-16.25,84.538
CH1: J4.1 R4A.1 | length 11.2
  L1 w0.254: J4.1@-27.068,79.098 -26.057,80.109 -21.223,80.109 -21.164,80.169 R4A.1@-16.3,80.169
CH2: J2.1 R12B.1 | length 11.7
  L1 w0.254: J2.1@-27.068,71.396 -17.165,71.396 -16.106,70.337 R12B.1@-16.106,70.012
CH3: J5.1 R4B.1 | length 12
  L1 w0.254: J5.1@-27.068,63.695 -20.96,63.695 -18.7,65.955 -16.468,65.955 R4B.1@-16.156,65.643
CH4: J8.1 R12C.1 | length 12.4
  L1 w0.254: J8.1@-27.068,55.993 -17.404,55.993 -15.731,54.32 R12C.1@-15.731,53.995
CH5: J10.1 R4C.1 | length 11.8
  L1 w0.254: J10.1@-27.068,48.291 -19.634,48.291 -18.3,49.626 R4C.1@-15.781,49.626
CH6: J9.1 R12D.1 | length 11.5
  L1 w0.254: J9.1@-27.068,40.589 -16.179,40.589 -15.731,40.141 R12D.1@-15.731,40.128
CH7: J7.1 R4D.1 | length 12.5
  L1 w0.254: J7.1@-27.068,32.888 -22.717,32.888 -19.846,35.758 R4D.1@-15.781,35.758
CLK10_N: J1.A15
CLK10_P: J1.A14
ERRIN0: IC2.63 IC15.14 R25.1 R26.2 | length 46.9
  L1 w0.13: R25.1@-16.784,12.471 -16.755,12.5 v1(-16,12.5) ; v1(14.978,19.688) 15.03,19.739 15.03,21.033 IC15.14@15.082,21.084 ; v1(16.483,13.161) 16.495,13.149 18.743,13.149 IC2.63@18.754,13.138
  L1 w0.254: R25.1@-16.784,12.471 -16.784,11.464 R26.2@-16.58,11.261
  L3 w0.13: v1(14.978,19.688) 14.978,14.666 v1(16.483,13.161)
  L4 w0.13: v1(-16,12.5) -15.209,13.291 13.994,13.291 14.98,12.305 16.3,12.305 16.483,12.488 v1(16.483,13.161)
ERRIN1: IC2.64 IC15.13 R28.1 R29.2 | length 47.2
  L1 w0.13: R28.1@-15.93,17.2 -16.1,17.03 R29.2@-16.1,15.767 -16.077,15.79 -15.232,15.79 -15.156,15.714 -15.156,14.974 -14.9,14.717 v1(-14.9,14.617) ; v1(15.624,12.773) 15.695,12.844 16.055,12.844 16.06,12.849 16.17,12.849 16.381,12.638 IC2.64@18.754,12.638
  L1 w0.152: v1(14.317,20.027) 14.258,20.086 14.258,20.416 14.343,20.501 14.343,20.995 IC15.13@14.432,21.084
  L3 w0.13: 15.164,13.291 15.624,12.831 v1(15.624,12.773)
  L3 w0.152: v1(14.317,20.027) 14.317,14.139 15.155,13.3
  L4 w0.13: v1(-14.9,14.617) 6.683,14.617 6.9,14.4 9.6,14.4 10.25,13.75 14.723,13.75 15.624,12.849 v1(15.624,12.773)
ERRIN2: IC2.65 IC15.12 | length 13.8
  L1 w0.152: v1(13.587,20.1) 13.587,20.194 13.715,20.323 13.715,20.65 13.782,20.716 IC15.12@13.782,21.084 ; v1(14.481,12.091) 14.528,12.138 IC2.65@18.754,12.138
  L3 w0.152: v1(13.587,20.1) 13.526,20.039 13.526,16.16 13.994,15.691 13.994,12.577 v1(14.481,12.091)
ERRIN3: IC2.66 IC10.3 IC15.11 R76.1 | length 93
  L1 w0.152: R76.1@13.03,19.074 13.132,19.176 13.029,19.176 12.896,19.308 v1(12.896,19.759) 12.926,19.789 12.926,20.317 13.132,20.523 IC15.11@13.132,21.084 ; v1(13.68,11.767) 13.774,11.767 13.904,11.638 IC2.66@18.754,11.638 ; v1(43.925,65.9) IC10.3@43.925,67.2
  L3 w0.13: 13.131,19.478 13.131,15.923 13.68,15.374 13.68,14.38 v1(13.68,11.767)
  L3 w0.152: 13.131,19.478 12.896,19.713 12.896,20.288 13.012,20.403 13.012,21.043 13.979,22.01 v1(13.979,31) ; v1(43.9,32) 43.913,32.012 43.913,65.888 v1(43.925,65.9)
  L4 w0.152: v1@13.979,31.001 35.896,31.001 36.742,31.847 40.202,31.847 40.355,32 v1(43.9,32)
ETH_R1x_N: J1.B24
ETH_R1x_P: J1.B23
ETH_Rx_N: J1.B21
ETH_Rx_P: J1.B20
ETH_T1x_N: J1.A22
ETH_T1x_P: J1.A21
ETH_Tx_N: J1.A20
ETH_Tx_P: J1.A19
FAULTn: IC2.19 J1.B7 | length 10.7
  L1 w0.152: IC2.19@34.154,16.138 35.908,16.138 36.737,16.966 36.737,17.195 37.016,17.474 37.016,17.944 37.219,18.146 37.219,18.606 37.601,18.988 v1(38.294,18.988)
  L4 w0.152: v1(38.294,18.988) 38.964,19.658 39.364,19.658 39.503,19.798 41.369,19.798 41.575,20.004 42.434,20.004 J1.B7@42.548,20.118
GA0: IC2.27 IC15.19 J1.B1 R8.2 | length 32.2
  L1 w0.152: IC15.19@16.756,24.058 16.772,24.042 18.041,24.042 v1(18.058,24.025) ; v1(31.779,22.061) 31.779,21.986 31.954,21.811 IC2.27@31.954,20.838 ; v1(34.456,23.144) 34.456,23.806 R8.2@34.493,23.843
  L3 w0.152: v1(31.779,22.061) 32.862,23.144 v1(34.456,23.144)
  L4 w0.152: v1@18.137,24.025 19.16,24.025 19.329,24.195 23.674,24.195 23.918,23.95 26.928,23.95 27.03,24.053 30.04,24.053 30.111,23.982 30.486,23.982 30.622,24.117 31.278,24.117 31.677,23.718 31.821,23.718 32.013,23.527 32.013,23.518 32.278,23.252 32.653,23.252 32.686,23.285 34.028,23.285 34.102,23.21 34.389,23.21 v1(34.456,23.144) 34.517,23.144 34.825,23.451 34.932,23.451 35.145,23.664 40.436,23.664 40.963,24.191 41.405,24.191 41.878,23.718 J1.B1@42.548,23.718
GA1: IC2.21 IC10.6 IC15.20 J1.B2 R9.2 | length 83.9
  L1 w0.152: IC15.20@16.756,24.708 16.762,24.702 18.372,24.702 v1(18.378,24.695) ; IC2.21@34.154,17.138 35.213,17.138 35.271,17.079 36.06,17.079 36.179,17.198 36.179,17.427 36.356,17.604 36.356,18.802 37.848,20.294 37.848,20.704 37.93,20.786 37.93,21.094 38.196,21.359 38.415,21.359 ; v1(36.138,24.718) 36.138,24.178 36.161,24.154 36.161,23.932 R9.2@36.375,23.718 ; R9.2@36.375,23.698 36.477,23.597 38.057,23.597 38.318,23.336 38.915,23.336 39.089,23.162 v1(39.183,23.162) 39.584,22.761 39.584,22.124 38.819,21.36 38.416,21.36 ; v1(43.35,61.293) 43.925,61.868 IC10.6@43.925,62.8
  L3 w0.152: v1(35.965,35.407) 35.965,35.313 36.139,35.14 v1(36.138,24.718) ; v1(43.3,35.1) 43.35,35.15 v1(43.35,61.293)
  L4 w0.152: v1(18.378,24.695) 18.436,24.637 23.71,24.637 23.768,24.579 23.768,24.494 24.034,24.229 24.409,24.229 24.605,24.425 24.609,24.425 24.658,24.474 29.054,24.474 29.298,24.718 29.941,24.718 30.111,24.888 30.486,24.888 30.656,24.718 v1(36.138,24.718) ; v1(35.965,35.407) 35.965,35.394 36.405,34.954 36.78,34.954 36.926,35.1 42.37,35.1 42.515,34.954 42.891,34.954 42.97,35.033 43.233,35.033 v1(43.3,35.1) ; v1(39.183,23.162) 40.672,23.162 40.716,23.118 J1.B2@42.548,23.118
GA2: IC2.24 IC10.5 IC15.1 J1.B3 R10.2 | length 84.4
  L1 w0.152: IC15.1@15.732,25.732 17.384,25.732 17.462,25.654 18.54,25.654 19.457,24.738 19.457,23.802 v1(19.517,23.742) ; IC2.24@34.154,18.638 34.754,18.638 34.901,18.785 34.988,18.785 35.265,19.061 35.265,19.288 35.63,19.653 36.605,19.653 36.97,20.018 37.091,20.018 37.569,20.497 37.569,20.819 37.651,20.902 37.651,21.21 38.08,21.638 38.26,21.638 38.508,21.886 R10.2@38.508,22.785 ; v1(36.139,23.031) 36.185,23.031 36.224,23.07 36.682,23.07 36.93,23.318 37.942,23.318 38.221,23.039 38.294,23.039 R10.2@38.508,22.825 ; R10.2@38.508,22.805 R10.2@38.508,22.785 ; v1(39.089,22.417) 39.022,22.483 38.809,22.483 R10.2@38.508,22.785 ; v1(42.5,62.8) IC10.5@43.275,62.8
  L3 w0.152: v1(36.139,23.031) 36.592,23.484 v1(36.592,35.407) ; v1(42.5,62.8) 42.5,48.906 42.703,48.703 v1(42.703,35.407)
  L4 w0.152: v1(19.517,23.742) 21.295,23.742 21.306,23.753 21.681,23.753 21.692,23.742 22.666,23.742 23.123,23.285 23.935,23.285 23.937,23.287 24.973,23.287 25.048,23.211 26.084,23.211 26.357,23.484 28.011,23.484 28.3,23.774 29.924,23.774 29.995,23.703 30.602,23.703 30.673,23.774 31.227,23.774 31.68,23.321 31.778,23.321 32.043,23.056 32.043,22.958 32.045,22.956 33.962,22.956 34.57,22.349 34.696,22.349 35.019,22.672 35.144,22.672 35.273,22.543 35.681,22.543 36.139,23.001 v1(36.139,23.031) ; v1(36.592,35.407) v1(42.703,35.407) ; v1(39.089,22.417) 39.183,22.417 39.327,22.561 42.505,22.561 J1.B3@42.548,22.518
GA3: IC2.25 IC15.10 J1.B4 R11.2 | length 41.4
  L1 w0.152: IC15.10@12.108,22.108 12.108,20.947 12.115,20.94 12.115,18.719 12.297,18.537 16.341,18.537 16.38,18.498 16.755,18.498 17.02,18.763 17.02,18.988 17.754,19.722 18.814,19.722 19.966,20.873 v1(19.966,22.328) ; IC2.25@34.154,19.138 34.754,19.138 34.928,19.312 34.928,19.434 35.475,19.981 ; v1(34.964,20.986) 35.003,20.947 35.003,20.347 35.369,19.981 35.475,19.981 ; v1(37.132,21.547) 37.132,20.947 R11.2@37.076,20.891 37.076,20.871 36.186,19.981 35.475,19.981
  L4 w0.152: v1(19.966,22.328) 20.93,22.328 21.019,22.239 21.019,22.205 21.285,21.94 24.266,21.94 24.798,22.472 26.771,22.472 27.224,22.019 29.197,22.019 29.871,21.345 31.458,21.345 31.475,21.328 32.082,21.328 32.099,21.345 32.915,21.345 32.932,21.328 33.538,21.328 33.555,21.345 34.388,21.345 34.388,21.252 34.627,21.013 34.937,21.013 v1(34.964,20.986) ; v1(37.132,21.547) 37.226,21.547 37.475,21.797 40.621,21.797 40.762,21.655 41.283,21.655 41.546,21.918 J1.B4@42.548,21.918
GND: B1.1 B2.1 C1A.2 C1B.2 C1C.2 C1D.2 C2.1 C3.1 C4.1 C5.1 C7A.1 C7B.1 C7C.1 C7D.1 C8A.2 C8B.2 C8C.2 C8D.2 C10A.1 C10B.1 C10C.1 C10D.1 C11.1 C12.2 C13.2 C14.2 C15.2 C16.1 C17.1 C18.1 C19.1 C20.1 C22.1 C23.1 C24.1 C25.1 C26.1 C27.1 C28.1 C29.1 C30.1 C31.1 C33.1 C34.1 C35A.1 C35B.1 C35C.1 C35D.1 C48.1 C49.1 C50.1 IC1.2 IC1.11 IC1.12 IC1.13 IC1.14 IC1.15 IC1.16 IC1.17 IC1.22 IC2.6 IC2.22 IC2.33 IC2.44 IC2.56 IC2.72 IC2.79 IC2.92 IC3A.3 IC3B.3 IC3C.3 IC3D.3 IC5.3 IC5.4 IC5.11 IC5.12 IC5.13 IC5.22 IC6.4 IC9.3 IC9.6 IC10.4 IC15.8 IC15.21 IC22.3 IC22.6 J1.A1 J1.A4 J1.A7 J1.A10 J1.A13 J1.A16 J1.A23 J1.A24 J1.A26 J1.B13 J1.B16 J1.B19 J1.B22 J1.B25 J6.5 LD5.1 LD6.1 LD7.1 NT1.2 NT2.2 NT3.2 NT4.2 NT5.2 NT6.2 NT7.2 NT9.2 NT10.2 NT11.2 NT12.2 NT13.2 NT14.2 NT15.2 NT16.2 NT19.2 NT20.2 P1.2 P2.2 R1.2 R3.1 R18.1 R23.1 R24.1 R26.1 R29.1 R47.2 R48.2 R77.1 R78.2 R79.1 | length 147.5
  L1 w0.13: v1(-21.4,26.223) C49.1@-21.4,27.078 ; v1(-13.1,17.644) -12.221,17.644 C50.1@-12.155,17.577 ; v1(-13.1,19.007) IC22.6@-10.186,19.007 ; v1(-12.881,23.723) -11.981,23.723 C34.1@-11.961,23.744 ; v1(-12.881,25.534) -12.14,25.534 C33.1@-12.025,25.419 -11.91,25.534 IC9.6@-10.194,25.534 ; C15.2@-11.4,4.466 -11.269,4.336 v1(-9.6,4.336) ; C8A.2@-10.05,84.536 -9.403,83.889 -9.403,83.771 v1(-9.332,83.7) ; C10A.1@-10,82.415 -9.403,81.818 -9.403,81.709 v1(-9.332,81.638) ; C8B.2@-9.906,70.01 -9.259,69.363 -9.259,69.245 v1(-9.188,69.174) ; C10B.1@-9.856,67.889 -9.259,67.292 -9.259,67.183 v1(-9.188,67.112) ; C7A.1@-9.775,77.95 -9.125,77.3 v1(-9.1,77.3) ; C1A.2@-9.775,80.057 -9.216,79.498 -9.216,79.371 v1(-9.145,79.3) ; C7B.1@-9.631,63.424 -8.981,62.774 v1(-8.956,62.774) ; C1B.2@-9.631,65.531 -9.072,64.972 -9.072,64.845 v1(-9.001,64.774) ; C8D.2@-9.531,40.126 -8.884,39.479 -8.884,39.36 v1(-8.813,39.289) ; C8C.2@-9.531,53.993 -8.884,53.346 -8.884,53.227 v1(-8.813,53.157) ; C10D.1@-9.481,38.004 -8.884,37.407 -8.884,37.298 v1(-8.813,37.228) ; C10C.1@-9.481,51.872 -8.884,51.274 -8.884,51.166 v1(-8.813,51.095) ; C7D.1@-9.256,33.539 -8.606,32.889 v1(-8.581,32.889) ; C1D.2@-9.256,35.647 -8.697,35.088 -8.697,34.96 v1(-8.626,34.889) ; C7C.1@-9.256,47.407 -8.606,46.757 v1(-8.581,46.757) ; C1C.2@-9.256,49.514 -8.697,48.955 -8.697,48.827 v1(-8.626,48.757) ; C31.1@-8.926,97.22 v1(-8.926,98.054) ; v1(-6.126,25.534) IC9.3@-4.794,25.534 ; R24.1@-6.126,96.32 -6.034,96.412 v1(-5.225,96.412) ; v1(-6.081,18.951) -4.842,18.951 IC22.3@-4.786,19.007 ; v1(-4.542,4.336) -4.542,5.29 R3.1@-4.525,5.308 ; IC6.4@-4.465,94.675 v1(-3.174,94.675) ; v1(-3.318,85.571) -3.232,85.571 C35A.1@-2.7,85.038 ; v1(-3.174,71.045) -3.089,71.045 C35B.1@-2.556,70.512 ; v1(-2.799,41.16) -2.713,41.16 C35D.1@-2.181,40.628 ; v1(-2.799,55.027) -2.713,55.027 C35C.1@-2.181,54.495 ; v1(-2.332,80.363) -2.291,80.322 -2.291,79.35 IC3A.3@-2.25,79.309 ; v1(-2.188,65.837) -2.147,65.796 -2.147,64.824 IC3B.3@-2.106,64.783 ; v1(-1.813,35.953) -1.772,35.912 -1.772,34.939 IC3D.3@-1.731,34.898 ; v1(-1.813,49.82) -1.772,49.779 -1.772,48.807 IC3C.3@-1.731,48.766 ; v1(8.129,50.972) 8.784,50.972 C16.1@8.895,51.083 ; v1(8.5,54.895) IC1.16@10.043,54.897 ; v1(8.5,55.897) IC1.14@10.043,55.897 ; C16.1@8.8,51.087 8.8,51.524 9.173,51.897 IC1.22@10.043,51.897 ; v1(9,54.399) v1(9,54.399) 10.042,54.398 IC1.17@10.043,54.397 ; v1(9.019,55.397) IC1.15@10.043,55.397 ; v1(9.819,21.877) 10.222,21.877 R79.1@10.467,21.79 ; v1(9.977,48.5) C27.1@9.977,49.226 ; v1(10.746,32.6) 11.442,32.6 C19.1@11.481,32.639 ; IC1.13@11.018,56.372 v1(11.018,57.348) ; v1(11.276,23.418) 11.281,23.413 12.103,23.413 IC15.8@12.108,23.408 IC15.21@14.432,23.408 ; v1(12.167,29.947) 12.817,29.947 R77.1@12.822,29.951 ; IC1.12@12.518,56.372 12.536,56.39 12.536,57.33 v1(12.555,57.348) ; IC1.2@13.493,51.397 13.518,51.372 14.262,51.372 14.338,51.295 14.338,50.174 14.498,50.014 v1(14.498,49.09) ; IC1.11@13.493,55.897 v1(14.506,55.897) ; J6.5@14.379,4.763 14.379,4.751 14.794,4.336 14.794,4.051 15.417,3.428 15.766,3.428 v1(15.837,3.357) ; IC5.3@14.931,34.885 14.938,34.892 16.106,34.892 v1(16.113,34.898) ; IC5.4@14.931,35.385 14.944,35.372 15.718,35.372 v1(15.732,35.358) ; v1(15.603,10.268) 15.673,10.338 15.872,10.338 16.222,10.688 R47.2@16.222,10.708 ; v1(16.59,16.367) 17.264,16.367 C4.1@17.289,16.392 17.534,16.638 IC2.56@18.754,16.638 ; v1(16.62,20.383) 16.62,19.71 R78.2@16.692,19.638 ; C30.1@18.832,22.417 19.077,22.172 19.077,21.98 19.16,21.897 v1(19.16,21.797) ; C3.1@20.777,23.284 20.793,23.3 v1(21.494,23.3) ; v1(21.947,6.538) 21.95,6.534 21.95,5.441 IC2.79@21.954,5.438 ; v1(22.854,3.558) 22.925,3.487 23.093,3.487 C11.1@23.533,3.047 ; IC2.44@23.454,20.838 23.454,22.477 C25.1@23.461,22.483 23.532,22.555 v1(24.24,22.555) ; C5.1@32.466,23.245 32.474,23.254 v1(32.474,23.875) ; v1(32.742,9.641) 32.743,9.639 34.152,9.639 IC2.6@34.154,9.638 35.313,9.638 35.406,9.731 36.194,9.731 C23.1@36.617,9.308 ; v1(32.932,17.593) 32.955,17.615 34.132,17.615 IC2.22@34.154,17.638 35.62,17.638 C2.1@35.666,17.592 ; C29.1@33.504,4.06 33.749,4.305 33.749,4.74 v1(33.771,4.763) ; C14.2@34.9,60.248 v1(34.9,61.557) ; R18.1@36.258,54.899 36.308,54.849 v1(37.305,54.849) ; v1(36.617,9.904) C23.1@36.617,9.308 ; C23.1@36.696,9.229 C23.1@36.617,9.308 ; v1(40.97,18.669) 41.321,18.318 J1.A10@42.748,18.318 ; v1(41.028,10.437) 41.122,10.437 41.203,10.518 J1.A23@42.748,10.518 ; v1(41.095,22.108) 41.195,22.108 41.385,21.918 J1.A4@42.748,21.918 ; v1(41.15,23.738) 41.16,23.728 42.738,23.728 J1.A1@42.748,23.718 ; v1(41.181,20.251) 41.281,20.251 41.413,20.118 J1.A7@42.748,20.118 ; v1@41.261,9.004 41.261,9.712 41.468,9.918 J1.A24@42.748,9.918 ; v1(41.273,9.004) 41.273,8.978 41.533,8.718 J1.A26@42.748,8.718 ; v1(41.382,16.645) 41.445,16.582 J1.A13@42.685,16.582 ; v1(41.418,14.659) 41.448,14.689 42.719,14.689 J1.A16@42.748,14.718 ; C13.2@44.475,59.298 44.485,59.308 v1(46.609,59.308)